# Altium PCB main - 1.PcbDoc
Units mil, origin at the board's own origin, x right, y up, seen from the top; angles counter-clockwise.
Board outline 6000 x 4000 mil, 2 copper layers (Top Layer, Bottom Layer); 27 components, 34 nets, 145 pads, 0 vias.
Unrouted connection lines stored in the file: 85.
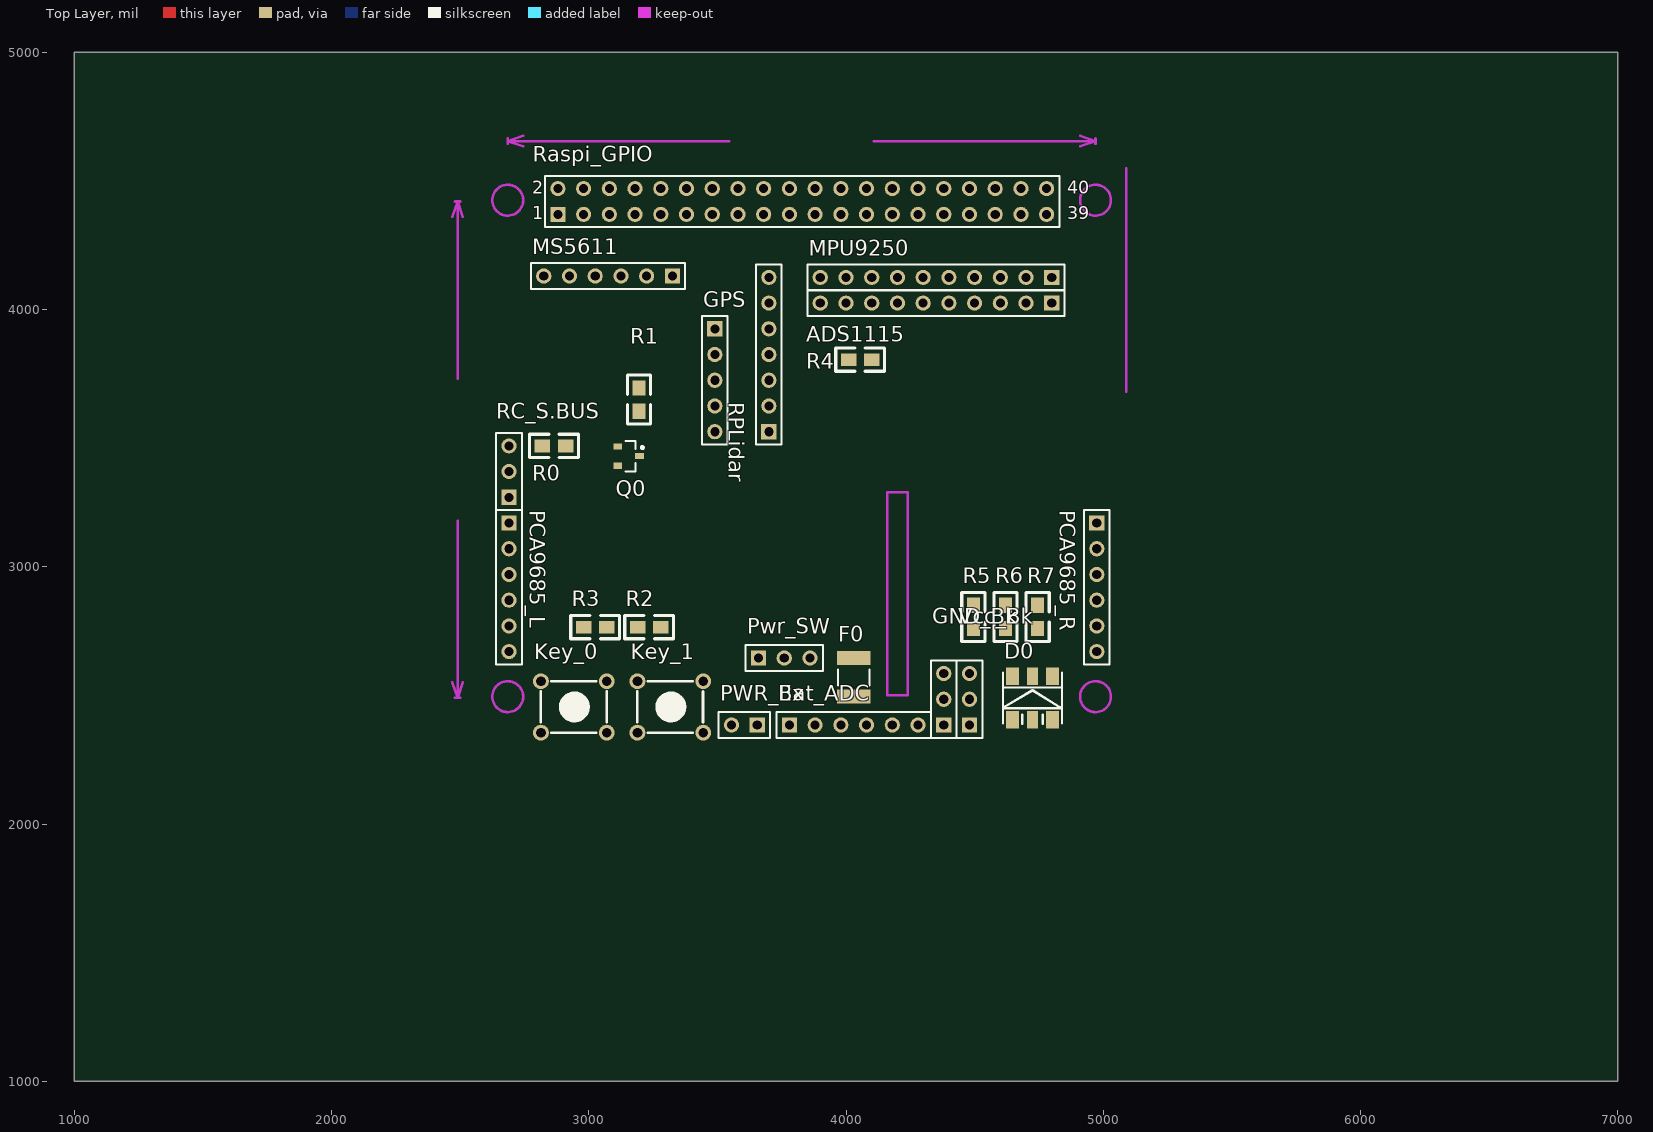
[diagram p0: Top Layer view]
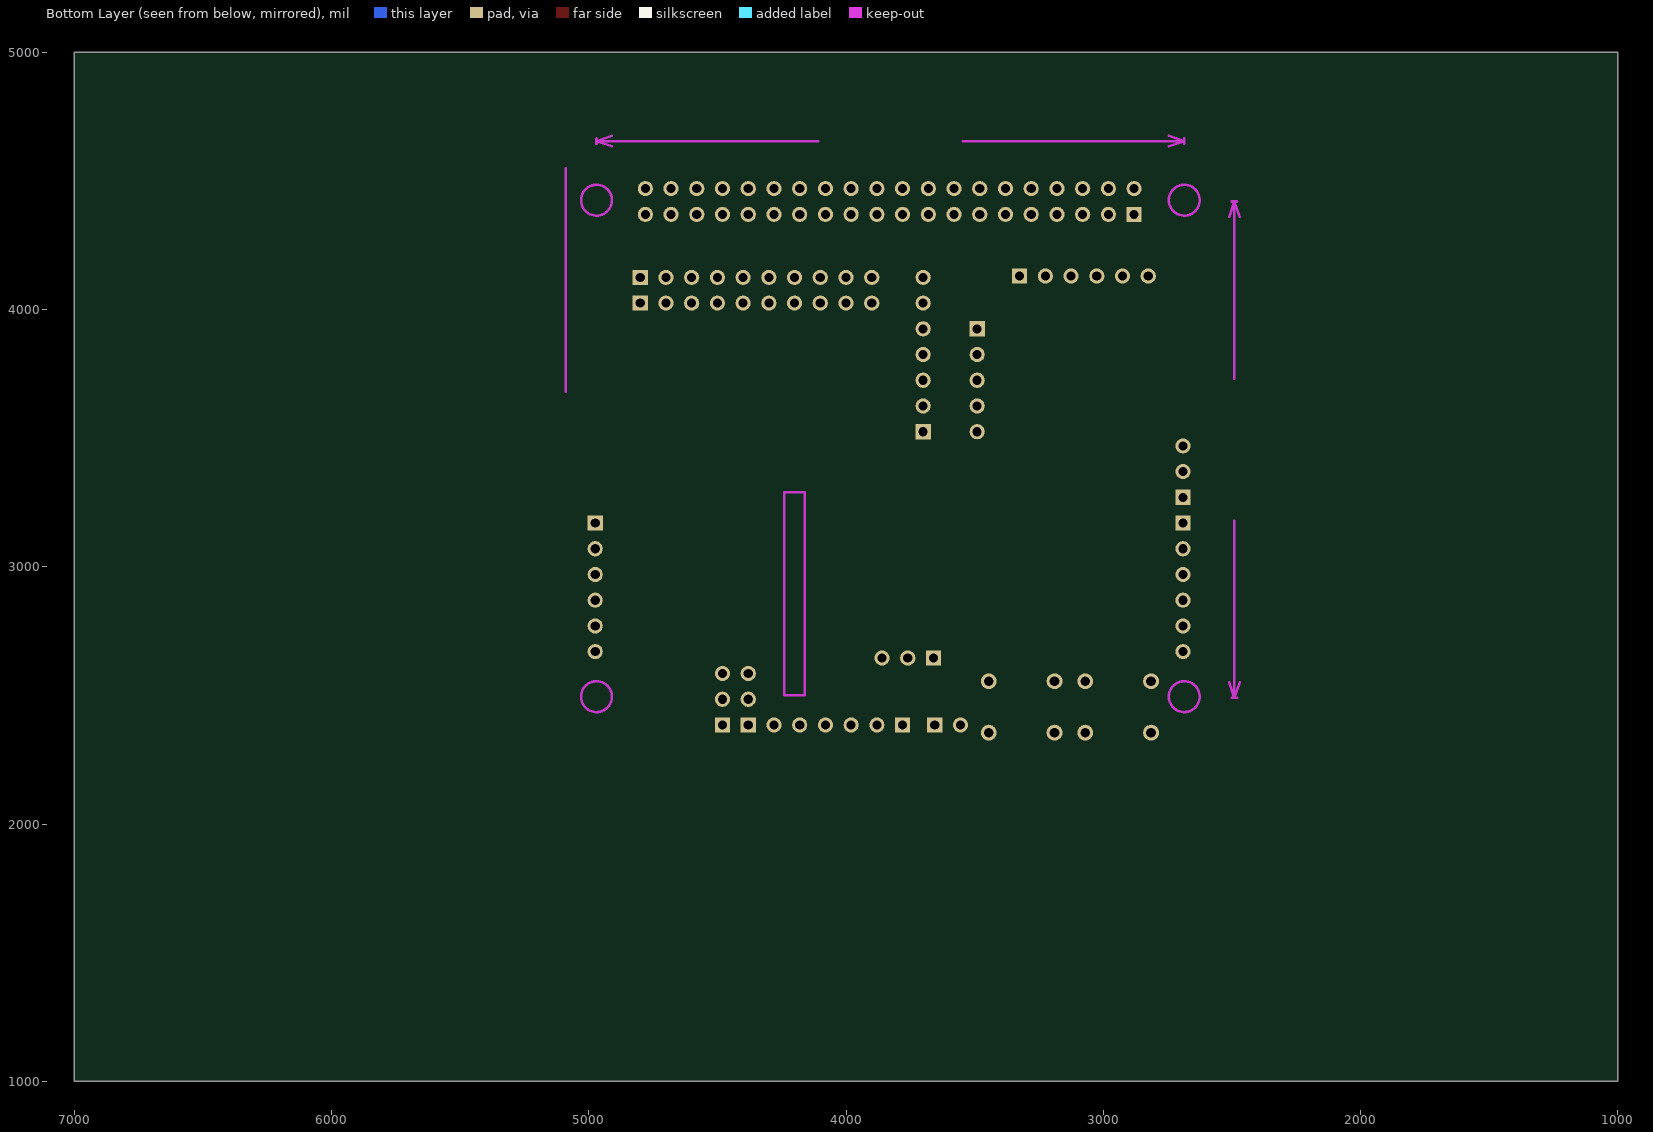
[diagram p1: Bottom Layer view, seen from below]

## Layer stack, top to bottom
Top Solder: solder mask 0.4, Solder Resist, Dk 3.5
Top Layer: signal copper 1.4
Dielectric 1: dielectric 12.6, FR-4, Dk 4.8
Bottom Layer: signal copper 1.4
Bottom Solder: solder mask 0.4, Solder Resist, Dk 3.5

## Board outline
1000,1000 7000,1000 7000,5000 1000,5000

## Design rules (kind name [scope] priority, off if disabled: settings)
Clearance [All] p1: gap=10
PolygonConnect [All] p1: connectstyle=Relief reliefconductorwidth=10 reliefentries=4 polygonreliefangle="90 Angle" airgapwidth=10
RoomDefinition Sensors [InComponentClass('Sensors')] p1: confinementstyle=ConfineIn formatcopy=TRUE lockcomponents=FALSE outline 0,0 2000,0 2000,1000 0,1000
RoomDefinition Rpi_GPIO [InComponentClass('Rpi_GPIO')] p2: confinementstyle=ConfineIn formatcopy=TRUE lockcomponents=FALSE outline 0,0 2000,0 2000,1000 0,1000
RoomDefinition etc [InComponentClass('etc')] p3: confinementstyle=ConfineIn formatcopy=TRUE lockcomponents=FALSE outline 0,0 2000,0 2000,1000 0,1000
RoutingVias [All] p1: holewidth=28 width=50 viastyle="Through Hole" minholewidth=28 minwidth=50 maxholewidth=28 maxwidth=50
SolderMaskExpansion [All] p1: expansion=4
Width [All] p1: maxlimit=10 minlimit=10 preferedwidth=10
30 further rules are at their usual default settings.

## Classes and differential pairs
component class Rpi_GPIO: Raspi_GPIO
component class Sensors: ADS1115 D0 GPS Key_0 Key_1 MPU9250 MS5611 PCA9685_L PCA9685_R Q0 R0 R1 R2 R3 R4 R5 R6 R7 RC_S.BUS RPLidar
component class etc: Bat_ADC F0 GND_Bk PWR_Ex Pwr_SW Vcc_Bk

## Components (designator, comment, footprint, x,y, rotation, side; value= is the part's Value field where it differs from the comment)
ADS1115 "第一轮先用于测试" HDR1X10 4800,4025 r180 top
Bat_ADC "最好是GH接头的，但是考虑到焊接难度，还是修改电压计的线" HDR1X6 3780,2385 r0 top
D0 "LED-RGB" LED_5050_RGB 4735,2510 r90 top
F0 "3A，如果电供不上就直接短接" 1812 4030,2570 r270 top
GND_Bk "备用引脚" HDR1X3 4380,2385 r90 top
GPS "弯排母" HDR1X5 3490,3925 r270 top
Key_0 "" KEY_M 2814.09,2555 r0 top
Key_1 "" KEY_M 3189.09,2555 r0 top
MPU9250 "Header 10" HDR1X10 4800,4125 r180 top
MS5611 "记得粘海绵~" HDR1X6 3325,4130 r180 top
PCA9685_L "Header 6" HDR1X6 2690,3170 r270 top
PCA9685_R "Header 6" HDR1X6 4975,3170 r270 top
PWR_Ex "额外电源供电，最好使用接线端子" HDR1X2 3655,2385 r180 top
Pwr_SW "通过跳线帽选择从飞机电池供电还是额外供电" HDR1X3 3660,2645 r0 top
Q0 "9013" SOT23_L 3155,3430 r0 top
R0 "Res2" 0805 2910,3470 r180 top
R1 "Res2" 0805 3195,3605 r90 top
R2 "Res2" 0805 3190,2765.06 r0 top
R3 "Res2" 0805 3070,2764.94 r180 top
R4 "Res2" 0805 4010,3805.06 r0 top
R5 "Res2" 0805 4494.94,2760 r90 top
R6 "Res2" 0805 4619.94,2760 r90 top
R7 "Res2" 0805 4745,2760 r90 top
Raspi_GPIO "Header 20X2" HDR2X20 2880,4370 r0 top
RC_S.BUS "Header 3" HDR1X3 2690,3270 r90 top
RPLidar "Header 7" HDR1X7 3700,3525 r90 top
Vcc_Bk "备用引脚" HDR1X3 4480,2385 r90 top

## Footprints (in the part's own frame and the unit in brackets; to place one, negate y for a bottom-side part, rotate by r counter-clockwise, add the part's x,y. Pads: shape width x height; smd on the part's side, far side on the other; paste and mask are expansions set on the pad)
0805 [mil]
  rect 60x50 smd: 1(0,-0.06) 2(90,-0.06)
  silkscreen extent -50,-45 140,45
1812 [mm] "Chip Capacitor, Body 4.5x3.2mm, IPC High Density"
  rect 1.4x3.3 smd: 1(-1.9,0) 2(1.9,0)
  silkscreen extent -0.8,-1.55 0.8,1.55, body extent -2.4,-1.7 2.4,1.7, height 1.4
HDR1X2 [mm] "Connector; Header; 2 Position"
  rect 1.5x1.5 hole 0.9: 1(0,0)
  round 1.5 hole 0.9: 2(2.54,0)
  silkscreen extent -1.27,-1.27 3.81,1.27
HDR1X3 [mm] "Connector; Header; 3 Position"
  rect 1.5x1.5 hole 0.9: 1(0,0)
  round 1.5 hole 0.9: 2(2.54,0) 3(5.08,0)
  silkscreen extent -1.27,-1.27 6.35,1.27
HDR1X5 [mm] "Connector; Header; 5 Position"
  rect 1.5x1.5 hole 0.9: 1(0,0)
  round 1.5 hole 0.9: 2(2.54,0) 3(5.08,0) 4(7.62,0) 5(10.16,0)
  silkscreen extent -1.27,-1.27 11.43,1.27
HDR1X6 [mm] "Connector; Header; 6 Position"
  rect 1.5x1.5 hole 0.9: 1(0,0)
  round 1.5 hole 0.9: 2(2.54,0) 3(5.08,0) 4(7.62,0) 5(10.16,0) 6(12.7,0)
  silkscreen extent -1.27,-1.27 13.97,1.27
HDR1X7 [mm] "Connector; Header; 7 Position"
  rect 1.5x1.5 hole 0.9: 1(0,0)
  round 1.5 hole 0.9: 2(2.54,0) 3(5.08,0) 4(7.62,0) 5(10.16,0) 6(12.7,0) 7(15.24,0)
  silkscreen extent -1.27,-1.27 16.51,1.27
HDR1X10 [mm] "Connector; Header; 10 Position"
  rect 1.5x1.5 hole 0.9: 1(0,0)
  round 1.5 hole 0.9: 2(2.54,0) 3(5.08,0) 4(7.62,0) 5(10.16,0) 6(12.7,0) 7(15.24,0) 8(17.78,0) 9(20.32,0) 10(22.86,0)
  silkscreen extent -1.27,-1.27 24.13,1.27
HDR2X20 [mm] "Connector; Header; 20x2 Position"
  rect 1.5x1.5 hole 0.9: 1(0,0)
  round 1.5 hole 0.9: 2(0,2.54) 3(2.54,0) 4(2.54,2.54) 5(5.08,0) 6(5.08,2.54) 7(7.62,0) 8(7.62,2.54) 9(10.16,0) 10(10.16,2.54) 11(12.7,0) 12(12.7,2.54) 13(15.24,0) 14(15.24,2.54) 15(17.78,0) 16(17.78,2.54) 17(20.32,0) 18(20.32,2.54) 19(22.86,0) 20(22.86,2.54) 21(25.4,0) 22(25.4,2.54) 23(27.94,0) 24(27.94,2.54) 25(30.48,0) 26(30.48,2.54) 27(33.02,0) 28(33.02,2.54) 29(35.56,0) 30(35.56,2.54) 31(38.1,0) 32(38.1,2.54) 33(40.64,0) 34(40.64,2.54) 35(43.18,0) 36(43.18,2.54) 37(45.72,0) 38(45.72,2.54) 39(48.26,0) 40(48.26,2.54)
  silkscreen extent -1.27,-1.27 49.53,3.81
KEY_M [mil]
  round 62 hole 38: 1(0,0) 1(255.91,0) 2(0,-200) 2(255.91,-200)
  silkscreen extent 0,-200 255,0
LED_5050_RGB [mm]
  rect 1.7x1.25 smd: A(-2.658,-1.721) A(-2.658,2.229)
  rect 1.7x1.1 smd: A(-2.658,0.254) K2(1.642,0.254)
  rect 1.7x1.3 smd: K1(1.642,2.229) K3(1.642,-1.721)
  silkscreen extent -3.05,-2.67 1.99,3.17
SOT23_L [mm] "SOT23, 3-Leads, Body 2.9x1.3mm, Pitch 0.95mm, Lead Span 2.3mm - Reverse Pinning, IPC High Density"
  rect 0.85x0.6 smd: 1(1.075,0) 2(-1.075,-0.95) 3(-1.075,0.95)
  silkscreen extent -0.3,-1.5 1.48,1.5, body extent -0.7,-1.5 0.7,1.5, height 1.1

## Part data
ADS1115: library part "Header 10", "Header, 10-Pin"
Bat_ADC MS5611: library part "Header 6", "Header, 6-Pin"
D0: "三基色LED"
F0: library part "Fuse 2", "Fuse"
GND_Bk Pwr_SW Vcc_Bk: library part "Header 3", "Header, 3-Pin"
GPS: library part "Header 5", "Header, 5-Pin"
Key_0 Key_1: library part KEY_M
MPU9250: "Header, 10-Pin"
PCA9685_L PCA9685_R: "Header, 6-Pin"
PWR_Ex: library part "Header 2", "Header, 2-Pin"
Q0: library part 2N3904, "NPN General Purpose Amplifier"
R0 R1 R2 R3 R4 R5 R6 R7: "Resistor"
Raspi_GPIO: "Header, 20-Pin, Dual row"
RC_S.BUS: "Header, 3-Pin"
RPLidar: "Header, 7-Pin"

## Nets (pads, with @x,y where several pads share a name; then routed paths per layer and width w, separated by ;. In a path a pad name is that pad's centre, name@x,y a point inside that pad or via, vN(x,y) a via of type N, cw(c..) or ccw(c..) an arc to the next point about the centre after c; other vN are vias at no path point)
3V3: Raspi_GPIO.1 Raspi_GPIO.17
5V: Raspi_GPIO.2 Raspi_GPIO.4
BACKUP_1: Raspi_GPIO.11
BACKUP_2: Raspi_GPIO.13
CUR_5: ADS1115.8 Bat_ADC.2 R4.2
GND: ADS1115.2 Bat_ADC.5 Bat_ADC.6 GND_Bk.1 GND_Bk.2 GND_Bk.3 GPS.1 Key_0.2 Key_1.2 MPU9250.2 MS5611.2 PCA9685_L.1 PWR_Ex.2 Q0.2 R4.1 Raspi_GPIO.6 Raspi_GPIO.9 Raspi_GPIO.14 Raspi_GPIO.20 Raspi_GPIO.25 Raspi_GPIO.30 Raspi_GPIO.34 Raspi_GPIO.39 RC_S.BUS.1 RPLidar.3 RPLidar.7
I2C_SCL: ADS1115.3 MS5611.3 PCA9685_L.3 Raspi_GPIO.5
I2C_SDA: ADS1115.4 MS5611.4 PCA9685_L.4 Raspi_GPIO.3
KEY_0: Key_0.1 R3.1 Raspi_GPIO.38
KEY_1: Key_1.1 R2.1 Raspi_GPIO.40
LED_B: R5.1 Raspi_GPIO.33
LED_G: R6.1 Raspi_GPIO.31
LED_R: R7.1 Raspi_GPIO.29
MOTOCTL: Raspi_GPIO.12 RPLidar.2
MPU9250_CS: MPU9250.9 Raspi_GPIO.26
MPU9250_INT: Raspi_GPIO.16
NetBat_ADC_3: Bat_ADC.3 Bat_ADC.4 F0.2
NetD0_1: D0.K1 R5.2
NetD0_3: D0.K2 R6.2
NetD0_4: D0.K3 R7.2
NetQ0_2: Q0.3 R0.1
PPM_DECODE: Raspi_GPIO.7
PPS_GPS: GPS.5
SBUS_IN: R0.2 RC_S.BUS.3
SCLK_9250: MPU9250.3 Raspi_GPIO.23
SDI_9250: MPU9250.4 Raspi_GPIO.19
SDO_9250: MPU9250.7 Raspi_GPIO.21
UBLOX_CS: Raspi_GPIO.24
USART_RX: GPS.4 Q0.1 R1.1 Raspi_GPIO.10 RPLidar.5
USART_TX: GPS.3 Raspi_GPIO.8 RPLidar.6
V_BATEX: PWR_Ex.1 Pwr_SW.1
V_UBEC: F0.1 Pwr_SW.3
VCC: ADS1115.1 ADS1115.9 D0.A GPS.2 MPU9250.1 MS5611.1 PCA9685_L.5 Pwr_SW.2 R1.2 R2.2 R3.2 RC_S.BUS.2 RPLidar.1 RPLidar.4 Vcc_Bk.1 Vcc_Bk.2 Vcc_Bk.3
VOL_5: ADS1115.7 Bat_ADC.1
pads on no net: ADS1115.5 ADS1115.6 ADS1115.10 MPU9250.5 MPU9250.6 MPU9250.8 MPU9250.10 MS5611.5 MS5611.6 PCA9685_L.2 PCA9685_L.6 PCA9685_R.1 PCA9685_R.2 PCA9685_R.3 PCA9685_R.4 PCA9685_R.5 PCA9685_R.6 Raspi_GPIO.15 Raspi_GPIO.18 Raspi_GPIO.22 Raspi_GPIO.27 Raspi_GPIO.28 Raspi_GPIO.32 Raspi_GPIO.35 Raspi_GPIO.36 Raspi_GPIO.37

## Keep-outs
Keep-Out Layer:
  circle w10: c4970,2495 r60
  circle w10: c2685,2495 r60
  circle w10: c4970,4425 r60
  circle w10: c2685,4425 r60
  lines w10: 2470,2550 2490,2490 ; 2470,4360 2490,4420 ; 2480,2490 2500,2490 ; 2480,4420 2500,4420 ; 2490,3179.08 2490,2490 ; 2490,3730.92 2490,4420 ; 2510,2550 2490,2490 ; 2510,4360 2490,4420 ; 2685,4645 2685,4665 ; 2745,4635 2685,4655 ; 2745,4675 2685,4655 ; 3546.59,4655 2685,4655 ; 4108.41,4655 4970,4655 ; 4910,4635 4970,4655 ; 4910,4675 4970,4655 ; 4970,4645 4970,4665 ; 5090,3680 5090,4550 ; 4160,2500 4160,3290 4240,3290 4240,2500 4160,2500
  text "2285 (mil)" at 3556.59,4619.01 h60
  text "1930 (mil)" at 2525.99,3189.08 h60 r90

## Text inside footprints (layer, text, board x,y; h text height)
Raspi_GPIO: Top Overlay "1" at 2780,4350 h50; Top Overlay "2" at 2780,4450 h50; Top Overlay "40" at 4860,4450 h50; Top Overlay "39" at 4860,4350 h50